# Altium PCB FMCWRadar.PcbDoc (part 5 of 5)
Units mil, origin at the board's own origin, x right, y up, seen from the top; angles counter-clockwise.
Board outline 4763.78 x 3464.57 mil, 6 copper layers (L1, L2(GND), L3, L4, L5(GND), L6), stack 32.112 mil thick; 306 components, 195 nets, 1057 pads, 1126 vias.
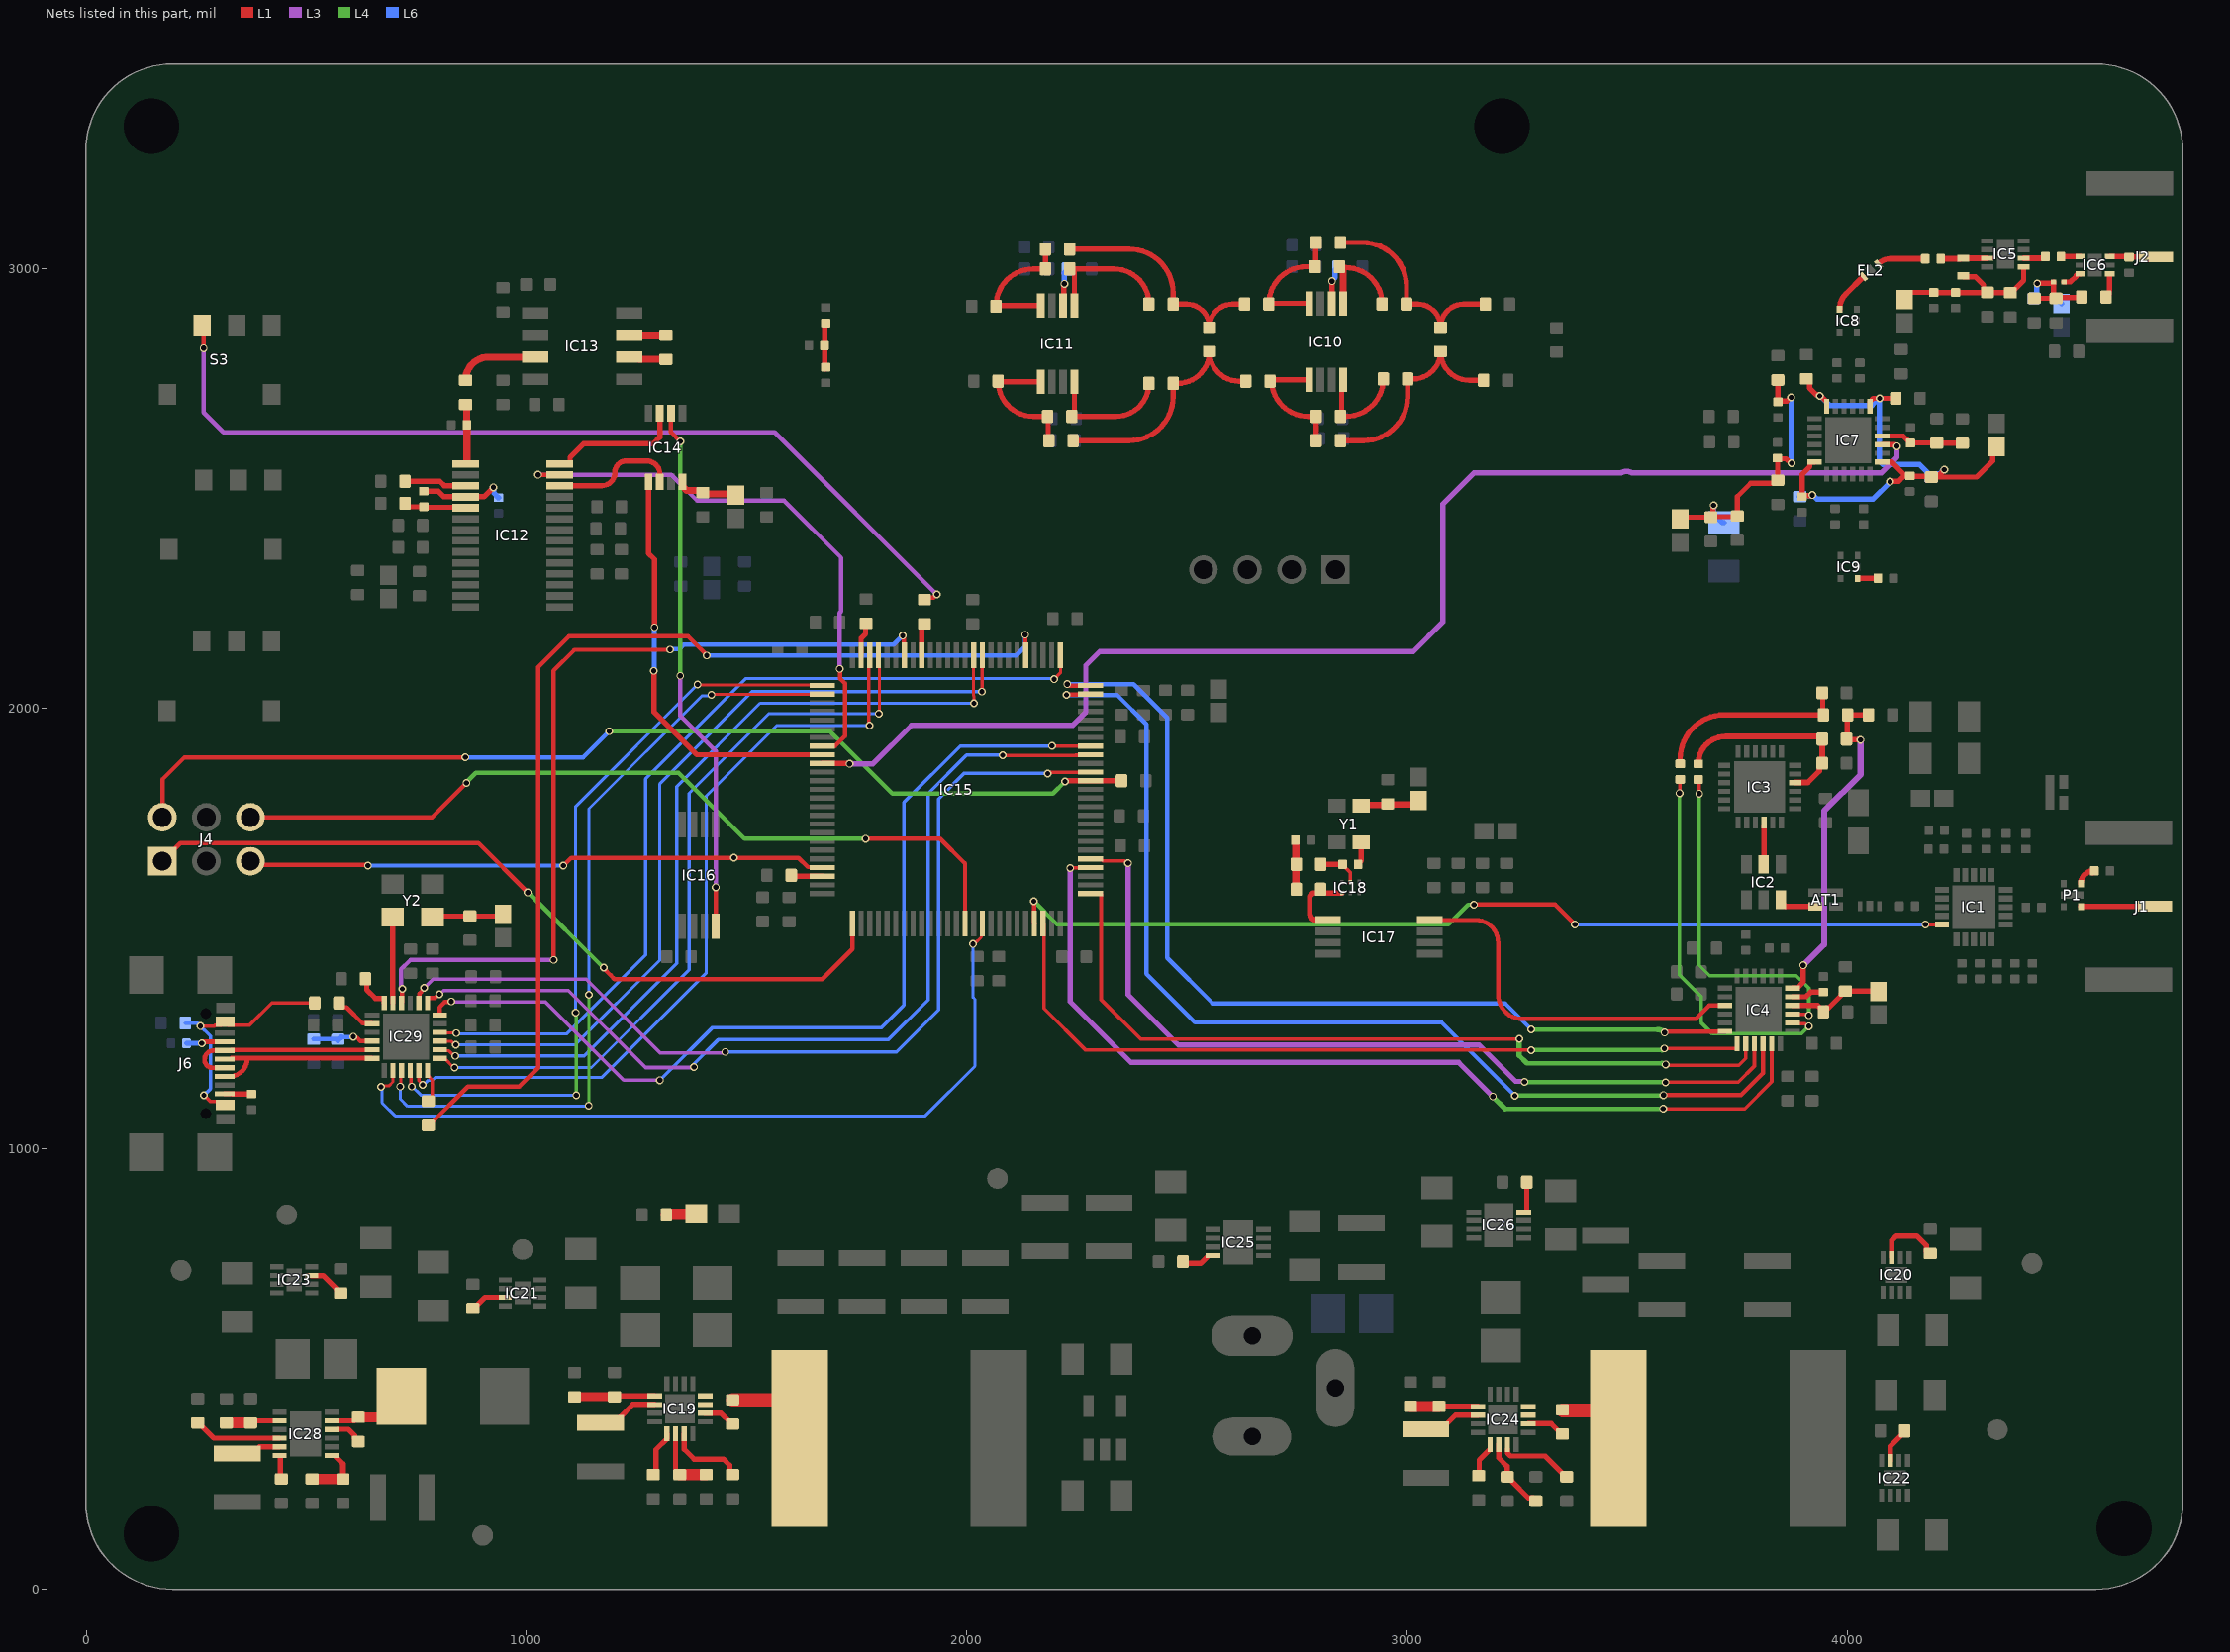
[diagram p8: the nets of this part, all layers, seen from the top]

## Via types
v1: diameter 17.72, hole 11.81, L1 to L6, tented both sides, 692 vias
v2: diameter 15.75, hole 11.81, L1 to L6, tented both sides, 386 vias
v3: diameter 27.56, hole 15.75, L1 to L6, tented both sides, 44 vias
v4: diameter 27.56, hole 11.81, L1 to L6, tented both sides, 3 vias
v5: diameter 23.62, hole 13.78, L1 to L6, tented both sides, 1 vias

## Nets (pads, with @x,y where several pads share a name; then routed paths per layer and width w, separated by ;. In a path a pad name is that pad's centre, name@x,y a point inside that pad or via, vN(x,y) a via of type N, cw(c..) or ccw(c..) an arc to the next point about the centre after c; other vN are vias at no path point) (continued)
NetC14_2: C14.2 C15.2 FB2.1 IC4.22 | length 223.8
  L1 w12: IC4.22@3876.19,1325.37 3933.47,1325.37 C15.2@3946.19,1312.65 ; C15.2@3946.19,1310.69 C15.2@3946.19,1312.65 ; C15.2@3946.19,1311.37 C15.2@3946.19,1312.65 ; FB2.1@4071.19,1357.31 4070.37,1358.13 3994.23,1358.13 3987.23,1351.13 3987.23,1349.17 3957.71,1319.65 3953.19,1319.65 C15.2@3946.19,1312.65
NetC18_2: C18.2 C19.2 IC4.24 R7.1 | length 767.5
  L1 w12: IC4.24@3876.19,1364.74 3886.83,1364.74 3900.61,1378.53 v1(3900.61,1416.8) ; v1(4030.53,1928.61) 4029.49,1929.65 4002.35,1929.65 4000.03,1931.97 4000.03,1984.41 C19.2@4001.31,1985.69 C18.2@4048.63,1985.69
  L3 w14: v1(3900.61,1416.8) 3947.86,1464.04 3947.86,1767.19 4030.53,1849.87 v1(4030.53,1928.61)
NetC19_1: C19.1 R9.2 R10.2 | length 447
  L1 w12: R10.2@3622.95,1878.32 R10.2@3621.04,1874.47 3621.04,1885.69 cw(c3721.04,1885.69) 3721.04,1985.69 C19.1@3946.19,1985.69 ; R9.2@3943.63,2035.69 3944.91,2034.41 C19.1@3944.91,1986.97
NetC20_2: C20.2 IC3.22 R6.2 R7.2 | length 460.6
  L1 w12.69: R6.2@3662.04,1874.19 cw(c3724.33,1874.19) 3724.33,1936.48 3937.84,1936.48 R7.2@3943.63,1930.69 C20.2@3943.63,1875.69 3936.98,1869.03 3936.98,1857.95 3911.1,1832.08 3882.75,1832.08 IC3.22@3882.31,1831.64
NetC29_1: C29.1 C30.2 C37.2 FB3.2 L1.2 R11.1 | length 285.1
  L1 w12: C30.2@4425.04,2931.47 C37.2@4469.33,2931.47 ; v1(4432.04,2965.47) 4466.62,2965.47 4469.33,2968.18 4469.33,2937.18 C37.2@4475.04,2931.47 4476.54,2932.97 4531.98,2932.97 R11.1@4533.48,2934.47
  L6 w12: v1(4432.04,2965.47) 4430.94,2964.38 4430.94,2937.38 C29.1@4425.04,2931.47 4475.66,2931.47 FB3.2@4487.04,2920.09
NetC33_2: C33.2 C34.1 C35.2 C36.2 FB4.2 IC5.1 L2.2 | length 383.3
  L1 w12: FB4.2@4130.76,2929.09 4130.76,2932 4143.62,2944.86 4196.7,2944.86 C35.2@4196.76,2944.8 C36.2@4246.76,2944.8 4310.08,2944.8 C34.1@4312.23,2942.65 ; L2.2@4264.04,2982.71 4266.11,2980.64 4291.26,2980.64 4310.08,2961.82 4310.08,2952.03 C34.1@4313.69,2948.42 ; C34.1@4319.04,2945.03 4319.54,2944.53 4370.54,2944.53 C33.2@4371.04,2944.03 ; C33.2@4373,2944.03 4401.38,2972.41 IC5.1@4401.38,3002.95
NetC38_1: C38.1 FL2.1 | length 108.5
  L1 w12.69: FL2.1@4071.97,3010.66 cw(c4098.08,2984.55) 4098.07,3021.47 C38.1@4177.61,3021.47
NetC38_2: C38.2 IC5.7 L2.1 | length 105.7
  L1 w12.69: C38.2@4213.04,3021.47 4216.54,3021.54 4257.39,3021.54 L2.1@4264.04,3022.47 4270.69,3022.63 IC5.7@4318.7,3022.63
NetC39_1: C39.1 IC5.2 | length 50.9
  L1 w12.69: IC5.2@4401.38,3022.63 4447.11,3022.63 C39.1@4450.61,3026.47
NetC39_2: C39.2 IC6.4 | length 43.8
  L1 w12.69: C39.2@4486.04,3026.47 4486.34,3026.77 IC6.4@4529.76,3026.77
NetC40_2: C40.2 IC6.3 J2.1 | length 101.7
  L1 w6.16: J2.1@4710.51,3019.35 J2.1@4715.08,3023.92
  L1 w12.69: IC6.3@4596.94,3026.52 C40.2@4631.28,3026.52 ; C40.2@4641.03,3025.33 J2.1@4701.92,3025.33
NetC41_1: C41.1 C42.2 C43.2 C44.2 C45.2 C46.2 C47.2 FB5.2 IC7.7 IC7.13 IC7.18 IC7.24 | length 1332.9
  L1 w12: C47.2@3907.76,2748.53 3914.61,2741.67 3914.61,2727.87 3929.8,2712.68 3933.52,2712.68 3936.38,2709.82 v1(3937.92,2709.82) ; v1(3920.95,2484.93) 3919.85,2483.84 3900.5,2483.84 C44.2@3897.76,2481.09 3897.76,2531.72 3915.41,2549.37 3915.41,2560.01 3915.5,2560.1 IC7.24@3926.14,2560.1 ; v1@3941.7,2708.73 3953.7,2696.73 IC7.18@3953.7,2686.09 ; IC7.13@4052.13,2686.09 4052.13,2696.73 4059.87,2704.47 C46.2@4111.04,2704.47 ; IC7.7@4079.68,2560.1 4101.28,2560.1 C45.2@4132.86,2528.52 ; v1(4097.46,2515.22) 4098.56,2516.31 4117.4,2516.31 4120.45,2519.37 4120.45,2519.53 4126.39,2525.47 4126.55,2525.47 4129.61,2528.52 C45.2@4132.86,2528.52 ; C43.2@4191.75,2525.65 4190.32,2527.08 4144.19,2527.08 C45.2@4142.76,2528.52 C45.2@4132.86,2528.52 ; C43.2@4193.72,2525.65 C43.2@4204.21,2525.65 ; v1(4221.04,2542.47) C43.2@4204.21,2525.65 ; FB5.2@4339.32,2594.8 4330.62,2586.1 4330.62,2562.06 4294.21,2525.65 C43.2@4204.21,2525.65
  L6 w12: C42.2@3892.76,2481.21 3895.39,2483.84 3919.85,2483.84 v1(3920.95,2484.93) 3922.5,2484.93 3931.57,2475.85 4059.44,2475.85 4097.46,2513.88 v1(4097.46,2515.22) ; v1(3937.92,2709.82) 3939.47,2709.82 3960.84,2688.45 4056.55,2688.45 4072.29,2704.2 v1(4073.84,2704.2) 4073.84,2561.62 4080.87,2554.59 4164.39,2554.59 C41.1@4184.08,2534.91 ; C41.1@4191.75,2525.65 4198.75,2532.65 4209.66,2532.65 v1@4219.49,2542.47
NetC48_2: C48.2 C49.1 C50.1 C51.2 C52.2 FB6.1 R12.2 R13.2 | length 684.7
  L1 w12: FB6.1@3620.76,2430.32 3625.08,2434.65 C49.1@3690.76,2434.65 3695.94,2439.84 3695.94,2460.38 v1(3697.04,2461.47) ; C49.1@3692.72,2434.65 3694,2435.93 3749.48,2435.93 C50.1@3750.76,2437.21 3750.76,2481.19 3781.21,2511.65 3835.75,2511.65 C51.2@3842.75,2518.65 3842.4,2519 3842.4,2568.4 R12.2@3842.04,2568.76 3843.46,2567.34 3861.75,2567.34 3872.18,2556.9 v1(3873.72,2556.9) ; C52.2@3842.76,2746.09 R13.2@3842.76,2696.52 3844.53,2698.3 3863.24,2698.3 3871.68,2706.73 v1(3873.22,2706.73)
  L6 w12: v1(3697.04,2461.47) 3697.04,2441.68 3716.63,2422.09 C48.2@3720.76,2422.09 ; v1(3873.22,2706.73) 3873.47,2706.48 3873.47,2557.16 v1(3873.72,2556.9)
NetC57_2: C57.2 C58.2 IC7.10 R14.1 | length 189.7
  L1 w12: IC7.10@4079.68,2619.16 4079.78,2619.06 4127.48,2619.06 4139.21,2607.33 4139.21,2606.88 4143.05,2603.04 C57.2@4144.04,2603.04 4144.12,2603.12 4203.96,2603.12 C58.2@4204.04,2603.2 4204.4,2602.84 4261.68,2602.84 R14.1@4262.04,2602.47
NetC60_2: C60.2 IC9.1 | length 48.1
  L1 w12.69: IC9.1@4024.04,2295.5 4070.04,2295.5 C60.2@4070.04,2296.09 cw(c4069.05,2296.09) C60.2@4069.05,2295.1
NetC62_1: C62.1 IC10.5 R15.1 R19.2 | length 289.8
  L1 w12: IC10.5@2778.25,2746.91 2692.58,2746.91 ccw(c2775.97,2746.91) 2775.97,2663.53 C62.1@2794.08,2663.53 R15.1@2794.08,2608.53
NetC62_2: C62.2 IC10.8 R18.1 | length 234.3
  L1 w12: IC10.8@2856.64,2748.53 ccw(c2856.64,2746.91) IC10.8@2855.02,2746.91 2852.16,2744.06 2852.16,2666.5 C62.2@2849.2,2663.53 2861.64,2663.53 ccw(c2861.64,2748.53) R18.1@2946.64,2748.53
NetC63_1: C63.1 C64.2 IC11.5 R16.1 | length 311.7
  L1 w12: IC11.5@2168.25,2741.91 2073.25,2741.91 cw(c2073.25,2743.53) C64.2@2071.64,2743.53 ccw(c2151.64,2743.53) 2151.64,2663.53 C63.1@2184.08,2663.53 2185.36,2662.25 2185.36,2609.81 R16.1@2186.64,2608.53
NetC63_2: C63.2 IC11.8 R20.1 | length 298.5
  L1 w12: IC11.8@2245.02,2741.91 2245.02,2669.36 C63.2@2239.2,2663.53 2245.02,2663.53 2339.08,2663.53 ccw(c2339.08,2738.53) R20.1@2414.08,2738.53
NetC65_1: C65.1 R15.2 R17.1 R18.2 | length 495.4
  L1 w12: R15.2@2849.2,2608.53 2901.76,2608.53 ccw(c2901.76,2708.53) 3001.76,2708.53 R18.2@3001.76,2748.53 3014.2,2748.53 ccw(c3014.2,2810.97) C65.1@3076.64,2810.97 ccw(c3142.13,2810.97) 3142.13,2745.47 R17.1@3174.48,2745.47
NetC65_2: C65.2 R22.1 R23.2 R26.2 | length 486.2
  L1 w12: R26.2@2849.2,3058.53 2899.2,3058.53 cw(c2899.2,2958.53) 2999.2,2958.53 R23.2@2999.2,2918.53 3024.2,2918.53 cw(c3024.2,2866.09) C65.2@3076.64,2866.09 cw(c3129.02,2866.09) 3129.02,2918.47 R22.1@3178.48,2918.47
NetC66_1: C66.1 R16.2 R19.1 R20.2 | length 559.2
  L1 w12: R16.2@2241.76,2608.53 2369.2,2608.53 ccw(c2369.2,2708.53) 2469.2,2708.53 R20.2@2469.2,2738.53 2479.2,2738.53 ccw(c2479.2,2810.97) C66.1@2551.64,2810.97 ccw(c2619.08,2810.97) 2619.08,2743.53 R19.1@2634.08,2743.53
NetC66_2: C66.2 R24.1 R25.2 R27.2 | length 539.3
  L1 w12: R27.2@2234.2,3043.53 2369.2,3043.53 cw(c2369.2,2943.53) 2469.2,2943.53 R25.2@2469.2,2918.53 2499.2,2918.53 cw(c2499.2,2866.09) C66.2@2551.64,2866.09 cw(c2604.08,2866.09) 2604.08,2918.53 R24.1@2631.52,2918.53
NetC67_2: C67.2 C71.1 IC11.4 R27.1 | length 308.5
  L1 w12: IC11.4@2168.25,2915.14 2068.25,2915.14 ccw(c2068.25,2913.53) C67.2@2066.64,2913.53 cw(c2151.64,2913.53) 2151.64,2998.53 C71.1@2179.08,2998.53 R27.1@2179.08,3043.53
NetC68_2: C68.2 IC10.2 | length 89.5
  L1 w12: IC10.2@2829.43,2920.14 2829.74,2920.45 2829.74,2970.17 v1(2830.04,2970.47)
  L6 w12: v1(2830.04,2970.47) 2830.04,2972.02 2837.08,2979.06 2837.08,2996.53 C68.2@2844.08,3003.53
NetC69_2: C69.2 IC11.2 | length 86.9
  L1 w12: IC11.2@2219.43,2915.14 2220.94,2916.65 2220.94,2963.38 v1(2222.04,2964.47)
  L6 w12: v1(2222.04,2964.47) 2222.08,2989.57 C69.2@2229.08,2998.53
NetC70_1: C70.1 IC10.4 R24.2 R26.1 | length 302
  L1 w12: IC10.4@2778.25,2920.14 2688.25,2920.14 ccw(c2688.25,2918.53) R24.2@2686.64,2918.53 cw(c2771.64,2918.53) 2771.64,3003.53 C70.1@2791.52,3003.53 2792.8,3004.81 2792.8,3057.25 R26.1@2794.08,3058.53
NetC70_2: C70.2 IC10.1 R23.1 | length 229.7
  L1 w12: C70.2@2846.64,3001.57 2861.04,3001.57 cw(c2861.04,2918.53) R23.1@2944.08,2918.53
  L1 w16: C70.2@2846.64,3001.57 2855.02,2993.18 IC10.1@2855.02,2920.14
NetC71_2: C71.2 IC11.1 R25.1 | length 315.1
  L1 w12: IC11.1@2245.02,2915.14 2245.02,2987.7 ccw(c2234.2,2987.7) C71.2@2234.2,2998.53 2334.08,2998.53 cw(c2334.08,2918.53) R25.1@2414.08,2918.53
NetC88_1: C88.1 IC12.1 R30.2 | length 136.5
  L1 w16: IC12.1@861.76,2556.13 864.19,2556.13 864.75,2556.69 C88.1@864.75,2644.47 ; R30.2@861.76,2690.53 864.18,2688.1 C88.1@864.18,2646.03
NetC89_2: C89.2 FB7.1 IC14.8 | length 140.1
  L1 w16: IC14.8@1354.14,2515.33 1354.14,2505.49 1363.98,2495.65 1395.75,2495.65 C89.2@1400.75,2490.65 1403.73,2487.68 1472.78,2487.68 FB7.1@1475.76,2484.7
NetC93_2: C93.2 IC12.3 | length 141.6
  L1 w12: C93.2@724.31,2516.09 803.42,2516.09 813.38,2506.13 IC12.3@861.76,2506.13
NetC94_2: C94.2 IC12.5 R33.1 | length 142
  L1 w12: C94.2@724.31,2466.09 724.31,2465.37 731.31,2458.37 R33.1@766.76,2458.37 767.88,2457.25 860.63,2457.25 IC12.5@861.76,2456.13
NetC118_2: C118.2 IC15.73 | length 71.1
  L1 w12: C118.2@1601.76,1621.09 1603.51,1619.33 1672.01,1619.33 IC15.73@1672.11,1619.24
NetC121_1: C121.1 IC15.49 | length 77.6
  L1 w12: IC15.49@1760.22,2120.73 1760.31,2120.83 1760.31,2159.38 1770.49,2169.56 1770.49,2192.26 C121.1@1771.75,2193.53
NetC122_2: C122.2 R38.2 R39.1 | length 111
  L1 w16: C122.2@2746.76,1701.09 2747.98,1699.87 2747.98,1646.09 2747.98,1592.31 R39.1@2749.2,1591.09
NetC123_2: C123.2 FB12.2 Y1.4 | length 138.3
  L1 w15: Y1.4@2896.76,1778.76 2899.14,1781.15 2956.33,1781.15 C123.2@2958.56,1783.37 ; C123.2@2956.76,1783.53 2958.49,1781.8 3017.46,1781.8 FB12.2@3026.76,1791.09
NetC124_1: C124.1 Y1.3 | length 53
  L1 w12.69: C124.1@2889.47,1646.09 2889.47,1647.07 2896.76,1654.36 Y1.3@2896.76,1696.09
NetC124_2: C124.2 IC18.2 R38.1 | length 98.4
  L1 w8: C124.2@2854.04,1646.09 2854.04,1645.1 2871.76,1627.39 IC18.2@2871.76,1604.71
  L1 w12.69: R38.1@2804.31,1646.09 C124.2@2854.04,1646.09
NetC128_1: C128.1 IC19.10 | length 72.7
  L1 w12: IC19.10@1405.85,399.39 1441.53,399.39 1466.33,374.59 C128.1@1468.29,374.59
NetC128_2: C128.2 IC19.11 IC19.12 L3.1 | length 211.1
  L1 w30: C128.2@1468.29,429.71 1571.56,429.71 1620.53,380.73 L3.1@1620.53,342.15
NetC133_1: C133.1 IC20.7 | length 150.8
  L1 w12: IC20.7@4101.63,752.78 4101.72,752.87 4101.72,791.46 4112.26,801.99 4158.52,801.99 4180.08,780.43 4180.08,766.75 C133.1@4184.86,761.96
NetC135_1: C135.1 IC21.7 | length 84.2
  L1 w12: C135.1@878.29,637.15 880.25,637.15 905.96,662.86 IC21.7@951.79,662.86
NetC139_1: C139.1 IC19.5 | length 105.3
  L1 w12: C139.1@1288.29,259.71 1294.31,265.73 1294.31,316.59 1319.24,341.51 IC19.5@1319.24,352.15
NetC140_2: C140.2 IC19.2 | length 91.8
  L1 w12: C140.2@1211.91,389.97 1212.37,389.97 1241.48,419.08 IC19.2@1291.68,419.08
NetC141_1: C141.1 IC22.7 | length 80.9
  L1 w12: IC22.7@4098.45,291.52 4098.45,324.48 4130.93,356.96 C141.1@4130.93,358.92
NetC143_1: C143.1 IC23.7 | length 84
  L1 w12: IC23.7@512.03,712.15 512.13,712.06 538.39,712.06 569.33,681.11 569.33,679.15 576.33,672.15 C143.1@578.29,672.15
NetC148_1: C148.1 IC24.10 | length 87
  L1 w12: IC24.10@3275.85,375.22 3328.14,375.22 3351.33,352.03 C148.1@3353.29,352.03
NetC148_2: C148.2 IC24.11 IC24.12 L4.1 | length 161.9
  L1 w31.5: C148.2@3354.79,405.65 3433.81,405.65 3480.53,358.92 L4.1@3480.53,342.15
NetC151_1: C151.1 IC24.5 | length 81.6
  L1 w12: C151.1@3163.29,257.15 3164.39,258.25 3164.39,292.5 3189.24,317.34 IC24.5@3189.24,327.98
NetC152_2: C152.2 IC24.2 | length 132
  L1 w12: C152.2@3043.29,362.15 3078.29,362.15 3111.05,394.91 IC24.2@3161.68,394.91
NetC158_2: C158.2 IC25.4 | length 77.9
  L1 w12: C158.2@2491.16,743.57 2495.1,739.63 2531.71,739.63 2549.42,757.35 IC25.4@2560.06,757.35
NetC166_2: C166.2 IC26.4 | length 74.6
  L1 w12: IC26.4@3265.93,856.34 3272.41,856.34 3272.5,856.43 C166.2@3272.5,924.41
NetC167_1: C167.1 IC28.10 | length 63.3
  L1 w12: IC28.10@570.93,362.28 571.21,362.56 595.54,362.56 609.33,348.77 609.33,341.59 616.33,334.59 C167.1@618.29,334.59
NetC167_2: C167.2 IC28.11 L5.1 | length 181.8
  L1 w12: IC28.11@557.35,381.68 608.3,381.68 616.33,389.71 C167.2@618.29,389.71 ; L5.1@668.72,389.71 L5.1@716.16,437.15
  L1 w23: C167.2@618.29,389.71 L5.1@668.72,389.71
NetC168_1: C168.1 IC28.4 | length 200.4
  L1 w12: C168.1@253.29,377.15 255.25,377.15 290.09,342.31 IC28.4@439.24,342.31
NetC169_2: C169.2 IC28.5 | length 102.4
  L1 w12: C169.2@343.29,307.15 378.29,307.15 393.76,322.62 IC28.5@439.24,322.62
NetC172_1: C172.1 C173.2 IC29.4 | length 140.4
  L1 w10: v1(607.04,1254.47) 608.51,1253 614.5,1253 622.59,1244.91 649.07,1244.91 IC29.4@649.51,1244.47
  L6 w10: C173.2@516.76,1248.65 C172.1@571.75,1248.65 ; C172.1@579.17,1253.51 v1@606.08,1253.51
  L6 w12.69: C172.1@571.75,1246.1 C172.1@579.17,1253.51 ; v1@606.08,1253.51 v1(607.04,1254.47)
NetC180_1: C180.1 J6.A4 J6.B4 R57.2 | length 554
  L1 w8: v1(259.47,1278.53) 291.14,1278.53 292.98,1280.36 306.66,1280.36 314.47,1288.17 322.15,1280.49 370.95,1280.49 421.55,1331.09 R57.2@519.2,1331.09 ; v1(267.47,1121.53) 267.93,1121.53 282.45,1107.01 306.66,1107.01 J6.B4@314.47,1099.2
  L6 w8: C180.1@225.03,1285.53 252.47,1285.53 v1(259.47,1278.53) 282.22,1255.78 282.22,1136.27 v1(267.47,1121.53)
NetC181_2: C181.2 FB13.2 Y2.4 | length 162.7
  L1 w12: Y2.4@786.76,1526.28 789.12,1528.65 C181.2@871.75,1528.65 942.7,1528.65 FB13.2@946.76,1532.7
NetFL2_3: FL2.3 IC8.1 | length 93.4
  L1 w12.69: IC8.1@3983.27,2907.07 cw(c4032.2,2907.07) 3997.6,2941.67 FL2.3@4036.49,2980.57
NetIC1_5: IC1.5 IC15.97 | length 2173.8
  L1 w10: v1(2152.58,1562.47) 2153.25,1561.8 2153.25,1512.11 IC15.97@2153.92,1511.44 ; v1(3152.58,1554.59) 3336.63,1554.59 v1(3381.83,1509.39) ; v1(4178.09,1509.39) IC1.5@4215.49,1509.39
  L4 w10: v1(2152.58,1562.47) 2205.51,1509.54 3094.38,1509.54 3139.14,1554.3 3152.29,1554.3 v1(3152.58,1554.59)
  L6 w10: v1(3381.83,1509.39) v1(4178.09,1509.39)
NetIC2_2: IC2.2 IC3.16 | length 86.8
  L1 w12.69: IC2.2@3811.46,1646.82 IC3.16@3811.46,1733.65
NetIC4_9: IC4.9 IC17.8 | length 861.9
  L1 w10: IC17.8@3052.42,1519.47 3156.2,1519.47 cw(c3156.2,1467.98) 3207.7,1467.98 3207.7,1349.87 ccw(c3262.82,1349.87) 3262.82,1294.75 3656.52,1294.75 3687.14,1325.37 IC4.9@3722.65,1325.37
NetIC4_12: IC4.12 IC15.25 | length 2196.6
  L1 w10: v1(2228.72,2055.44) 2230.81,2055.44 2233.94,2052.31 IC15.25@2281.4,2052.31 ; v1(3585.59,1263.9) 3587.67,1263.9 3590.1,1266.32 IC4.12@3722.65,1266.32
  L4 w10: v1@3283.12,1270.51 3570.01,1270.51 ; v1@3584.11,1265.37 v1(3585.59,1263.9)
  L4 w12: 3570.01,1270.51 cw(c3570.01,1248.85) 3585.32,1264.16 v1(3585.59,1263.9)
  L6 w10: v1(2228.72,2055.44) 2307.78,2055.44 2307.82,2055.4 2379.08,2055.4 2455.73,1978.75 2455.73,1433.27 2558.45,1330.55 3223.08,1330.55 v1(3282.5,1271.13)
NetIC4_13: IC4.13 IC15.98 | length 1818.7
  L1 w8: IC15.98@2173.61,1511.44 2175.51,1509.54 2175.51,1482.1 2175.89,1481.72 2175.89,1318.68 2270.69,1223.88 v1(3282.5,1223.88) ; v1(3585.13,1227.85) 3748.3,1227.85 3750.21,1229.76 IC4.13@3750.21,1238.76
  L4 w10: v1(3282.5,1223.88) v1@3579.61,1223.88
  L4 w12: v1@3579.61,1223.88 3583.58,1227.85 v1(3585.13,1227.85)
NetIC4_14: IC4.14 IC15.1 | length 1852.1
  L1 w8: IC15.1@2281.4,1579.87 2303.75,1579.87 2305.66,1577.96 2305.66,1338.52 2394.62,1249.56 v1(3255.69,1249.56) ; v1(3587.98,1191.55) 3589.63,1189.89 3754.42,1189.89 3769.89,1205.37 IC4.14@3769.89,1238.76
  L4 w10: 3272.57,1194.44 v1@3580.19,1194.44
  L4 w12: v1@3254.99,1248.86 3254.99,1212.03 3272.57,1194.44 ; v1@3580.19,1194.44 3581.99,1192.64 3586.88,1192.64 v1(3587.98,1191.55)
NetIC4_15: IC4.15 IC15.5 | length 1958.4
  L1 w8: IC15.5@2281.4,1658.61 2304.53,1658.61 2309.44,1653.7 2359.02,1653.7 2364.05,1648.67 v1(2366.68,1648.67) ; v1(3587.84,1150.94) 3587.95,1151.05 3752.98,1151.05 3789.58,1187.65 IC4.15@3789.58,1238.76
  L3 w12: v1(2366.68,1648.67) 2366.68,1350.3 2481.29,1235.69 3164.39,1235.69 3247.21,1152.88 3266.3,1152.88 v1(3267.4,1151.78)
  L4 w10: v1@3268.24,1150.94 v1(3587.84,1150.94)
NetIC4_16: IC4.16 IC15.24 | length 2435.1
  L1 w10: v1(2226.9,2030.9) 2227.77,2031.76 2280.54,2031.76 IC15.24@2281.4,2032.62 ; v1(3583.17,1121.85) 3759.21,1121.85 3809.26,1171.9 IC4.16@3809.26,1238.76
  L4 w10: v1@3246.16,1121.09 v1@3582.41,1121.09
  L4 w12: v1(3245.4,1120.33) v1@3246.16,1121.09 ; v1@3582.41,1121.09 v1(3583.17,1121.85)
  L6 w10: v1(2226.9,2030.9) 2341.63,2030.9 2408.49,1964.04 2408.49,1397.11 2518.72,1286.87 3078.86,1286.87 v1(3245.4,1120.33)
NetIC4_17: IC4.17 IC15.4 | length 2156.3
  L1 w8: v1(2235.26,1637.27) 2236.09,1638.1 2280.57,1638.1 IC15.4@2281.4,1638.92 ; v1(3582.37,1090.93) 3767.66,1090.93 3828.95,1152.22 IC4.17@3828.95,1238.76
  L3 w12: v1(2235.26,1637.27) 2235.26,1334.12 2373.05,1196.32 3117.7,1196.32 v1(3195.33,1118.69)
  L4 w10: 3223.09,1090.93 v1(3582.37,1090.93)
  L4 w12: v1(3195.33,1118.69) 3223.09,1090.93
NetIC4_20: IC4.20 R10.1 | length 876.1
  L1 w8: v1(3619.53,1807.58) 3620.29,1808.33 3620.29,1838.29 R10.1@3621.04,1839.04 ; IC4.20@3876.19,1286 3878.1,1284.1 3904.68,1284.1 3910.64,1278.13 v1(3913.27,1278.13)
  L4 w8: v1(3619.53,1807.58) 3619.53,1394.73 3668.33,1345.93 3668.33,1286.87 3694.18,1261.02 3896.16,1261.02 v1(3913.27,1278.13)
NetIC4_21: IC4.21 R6.1 | length 795.4
  L1 w8: v1(3664.39,1806.56) R6.1@3664.39,1841.99 ; IC4.21@3876.19,1305.69 3908.09,1305.69 3910.65,1303.14 v1(3913.28,1303.14)
  L4 w8: v1(3664.39,1806.56) 3664.39,1416.8 3688.01,1393.17 3884.87,1393.17 3913.28,1364.76 v1(3913.28,1303.14)
NetIC4_23: IC4.23 R8.1 | length 74.4
  L1 w12: IC4.23@3876.19,1345.06 3876.29,1345.15 3906.83,1345.15 3917.37,1355.69 R8.1@3946.19,1355.69
NetIC6_1: IC6.1 R11.2 | length 56.1
  L1 w12: R11.2@4588.6,2934.47 4595.6,2941.47 4595.6,2949.68 4596.38,2950.46 IC6.1@4596.38,2987.31
NetIC6_6: IC6.6 L1.1 | length 45.6
  L1 w12: L1.1@4492.66,2968.47 4507.23,2968.47 4521.19,2982.44 4521.19,2983.57 4525.02,2987.4 IC6.6@4529.76,2987.4
NetIC7_9: IC7.9 IC15.60 | length 3011
  L1 w12: IC15.60@1672.11,1875.14 1672.2,1875.05 1733.61,1875.05 v1(1734.2,1874.46) ; IC7.9@4079.68,2599.47 4079.78,2599.38 4108.3,2599.38 4112,2595.67 v1(4113.55,2595.67)
  L3 w12: v1(1734.2,1874.46) 1787.41,1874.46 1874.52,1961.57 2240.66,1961.57 2270.69,1991.6 2270.69,2097.9 2302.19,2129.39 3014.79,2129.39 3081.72,2196.32 3081.72,2464.04 3152.58,2534.91 3483.13,2534.91 ccw(c3483.13,2546.91) 3488.78,2536.32 cw(c3499.08,2517.17) 3509.37,2536.33 ccw(c3515.03,2546.91) 3515.03,2534.91 4077.78,2534.91 4113.55,2570.68 v1(4113.55,2595.67)
NetIC12_4: IC12.4 R33.2 R34.2 | length 201.5
  L1 w12: R33.2@766.76,2493.8 799.57,2493.8 812.29,2481.09 861.76,2481.09 903.65,2481.09 v1(925.04,2502.47)
  L6 w12: v1(925.04,2502.47) 926.13,2501.38 926.13,2489.43 931.93,2483.63 931.93,2482.65 935.77,2478.8 R34.2@936.76,2478.8
NetIC12_26: IC12.26 IC14.6 | length 294.1
  L1 w12: IC12.26@1075.3,2506.13 1170.69,2506.13 ccw(c1170.69,2536.47) 1201.04,2536.47 cw(c1227.04,2536.47) 1227.04,2562.47 1273.04,2562.47 cw(c1273.04,2532.55) 1302.96,2532.55 IC14.6@1302.96,2515.33
NetIC12_27: IC12.27 IC15.58 | length 1265
  L1 w10: v1(1026.6,2530.97) 1026.67,2530.9 1075.49,2530.9 IC12.27@1075.56,2530.83 ; IC15.58@1695.14,1914.61 1700.89,1914.61 1723.45,1937.16 1723.45,2057.17 1712.73,2067.88 1712.73,2088.93 v1(1711.64,2090.02)
  L3 w10: v1(1026.6,2530.97) 1329.01,2530.97 1388.06,2471.91 1585.65,2471.91 1715.26,2342.3 1715.26,2220.52 1711.64,2216.9 v1(1711.64,2090.02)
NetIC12_28: IC12.28 IC14.3 | length 314.1
  L1 w12: IC12.28@1075.3,2556.13 1096.77,2556.13 1099.34,2558.69 1099.34,2570.73 1130.08,2601.47 1288.04,2601.47 1302.96,2616.39 IC14.3@1302.96,2670.84
NetIC13_2: IC13.2 R32.1 | length 85.3
  L1 w16: IC13.2@1233.53,2798.09 1250.75,2798.09 1255.75,2793.09 R32.1@1316.76,2793.09
NetIC13_3: IC13.3 R32.2 | length 83.3
  L1 w16: IC13.3@1233.53,2848.09 1233.59,2848.15 R32.2@1316.76,2848.21 R32.2@1316.76,2848.21
NetIC13_7: IC13.7 R30.1 | length 197.2
  L1 w16: R30.1@868.72,2750.65 863.72,2745.65 R30.1@861.76,2745.65 cw(c914.2,2745.65) 914.2,2798.09 IC13.7@1019.98,2798.09
NetIC14_2: IC14.2 IC16.8 | length 1209.9
  L1 w10: IC14.2@1328.55,2670.84 1328.55,2627.85 v1(1349.67,2606.73) ; IC16.8@1430.14,1505.42 v1(1430.14,1593.96)
  L3 w10: v1@1349.43,2076.49 1349.43,1983.72 1430.14,1903.02 v1(1430.14,1593.96)
  L4 w10: v1(1349.43,2074.28) 1349.55,2074.4 1349.55,2606.61 v1(1349.67,2606.73)
NetIC14_5: IC14.5 IC15.59 | length 952.1
  L1 w12: IC14.5@1277.37,2515.33 1277.37,2352.57 1290.98,2338.96 v1(1290.98,2184.5) ; v1(1289.52,2085.64) 1289.52,1992.45 1387.15,1894.83 IC15.59@1672.11,1894.83
  L6 w12: v1(1289.52,2085.64) 1290.25,2086.37 1290.25,2183.77 v1(1290.98,2184.5)
NetIC17_1: IC17.1 IC18.4 R39.2 | length 146.4
  L1 w12.69: IC17.1@2794.7,1519.68 cw(c2794.7,1534.85) 2779.53,1534.85 2779.53,1573.37 2786.96,1580.81 2797.66,1580.81 2804.31,1587.46 R39.2@2804.31,1589.42 ; R39.2@2804.31,1590.09 2813.31,1581.09 IC18.4@2852.07,1581.09
NetIC19_1: IC19.1 R43.1 R45.2 | length 183.3
  L1 w12: R45.2@1199.83,436.48 1202.02,438.67 1291.58,438.67 IC19.1@1291.68,438.76
  L1 w20: R43.1@1109.27,436.48 R45.2@1199.83,436.48
NetIC19_6: IC19.6 R42.1 R44.2 | length 157.5
  L1 w12: IC19.6@1338.92,352.15 1338.92,267.12 1346.33,259.71 R44.2@1348.29,259.71
  L1 w25: R44.2@1348.29,259.71 R42.1@1408.29,259.71
NetIC19_7: IC19.7 R46.2 | length 177.1
  L1 w12: IC19.7@1358.61,352.15 1358.61,317.07 1380.93,294.75 1447.86,294.75 1461.84,280.77 1461.84,266.16 R46.2@1468.29,259.71
NetIC24_1: IC24.1 R48.1 R50.2 | length 153.4
  L1 w12: R50.2@3073.29,414.59 IC24.1@3161.68,414.59
  L1 w25: R48.1@3008.29,414.59 R50.2@3073.29,414.59
NetIC24_6: IC24.6 R47.1 R49.2 | length 170.3
  L1 w12: IC24.6@3208.92,327.98 3209.01,327.88 3209.01,297.37 3227.71,278.68 3227.71,255.29 R49.2@3228.29,254.71 3230.25,254.71 3237.25,247.71 3237.25,245.75 3276.41,206.59 3286.29,206.59 R47.1@3293.29,199.59
NetIC24_7: IC24.7 R51.2 | length 165.5
  L1 w12: IC24.7@3228.61,317.24 3228.61,308.77 3235.64,301.74 3314.29,301.74 3361.33,254.71 R51.2@3363.29,254.71
NetIC28_2: IC28.2 R52.1 R54.2 | length 122.9
  L1 w12: R52.1@373.29,377.15 377.72,381.58 439.14,381.58 IC28.2@439.24,381.68
  L1 w25: R54.2@318.29,377.03 R54.2@318.29,377.03 373.23,377.09 R52.1@373.29,377.15
NetIC28_6: IC28.6 R55.2 | length 56
  L1 w12: IC28.6@439.24,302.94 441.17,302.94 441.26,302.84 441.26,251.74 R55.2@443.29,249.71
NetIC28_7: IC28.7 R53.1 R56.2 | length 131.5
  L1 w12: 554.73,249.71 556.04,251.02
  L1 w12.8: IC28.7@566.7,302.45 566.7,300.48 583.29,283.89 R53.1@583.29,249.71
  L1 w23: R56.2@513.29,249.71 554.73,249.71 R53.1@583.29,249.71
NetIC29_2: IC29.2 R57.1 | length 95.9
  L1 w10: R57.1@574.31,1331.09 574.31,1329.13 582.31,1321.13 591.63,1321.13 628,1284.75 648.61,1284.75 IC29.2@649.51,1283.84
NetIC29_12: IC29.12 R58.2 | length 81.1
  L1 w8: IC29.12@775.5,1177.54 775.5,1166.72 786.28,1155.94 786.28,1111.71 782.6,1108.03 R58.2@777.04,1108.03
NetIC29_23: IC29.23 Y2.3 | length 195.4
  L1 w12: Y2.3@696.2,1526.28 696.2,1348.84 696.76,1348.29 IC29.23@696.76,1331.09
NetIC29_24: IC29.24 R59.2 | length 84.4
  L1 w12: R59.2@634.31,1386.09 637.09,1383.31 637.09,1361.35 656.95,1341.49 676.98,1341.49 677.07,1341.39 IC29.24@677.07,1331.09
NetJ1_1: J1.1 P1.1 | length 136.7
  L1 w12.69: P1.1@4531.53,1550.66 4662.85,1550.66 J1.1@4666.64,1546.87
NetJ6_A5: J6.A5 R60.2 | length 88
  L1 w12: v1(262.47,1239.53) 264.01,1239.53 267.39,1242.9 J6.A5@314.47,1242.9
  L6 w12: R60.2@227.9,1239.53 v1(262.47,1239.53)
NetJ6_B5: J6.B5 R61.2 | length 61.2
  L1 w12: J6.B5@314.47,1124.79 331.01,1124.79 331.55,1124.24 R61.2@375.47,1124.24
NetLED1_2: LED1.2 R37.1 | length 72.9
  L1 w12: R37.1@1317.94,845.93 R37.1@1317.94,849.87
  L1 w25: R37.1@1317.94,849.87 1317.94,850.51 1318.44,851.01 1384.43,851.01 LED1.2@1385.57,852.15
NetP1_2: P1.2 R4.2 | length 52.8
  L1 w12.69: P1.2@4531.38,1602.15 cw(c4560.32,1602.15) 4560.32,1631.09 R4.2@4561.76,1631.09 4561.76,1630.1 R4.2@4558.26,1626.61
NetR28_2: R28.2 R29.2 R31.2 | length 106.6
  L1 w12: R31.2@1677.96,2770.91 1677.96,2824.47 R28.2@1677.96,2877.47
RF_OUT_TO_AT: AT1.1 IC2.6 | length 87
  L1 w12.69: IC2.6@3849.71,1565.38 ccw(c3864.75,1565.38) 3864.75,1550.34 AT1.1@3928.13,1550.34
SWD_CLK: IC15.76 J4.1 | length 1799.8
  L1 w10: J4.1@173.05,1653.02 214.03,1694 891.13,1694 v1(1002.98,1582.15) ; v1(1175.98,1411.42) 1175.98,1409.33 1191.6,1393.71 1191.6,1393.53 1199.83,1385.3 1672.27,1385.3 1740.53,1453.57 IC15.76@1740.53,1511.44
  L4 w10: v1(1002.98,1582.15) 1004.11,1582.15 1174.84,1411.42 v1(1175.98,1411.42)
SWD_DIO: IC15.72 J4.5 | length 1319.7
  L1 w10: J4.5@373.05,1653.02 381.34,1644.73 638.53,1644.73 v1(640.01,1643.26) ; v1(1083.89,1643.03) 1101.75,1660.89 v1(1471.48,1660.89) 1618.39,1660.89 1639.45,1639.83 1671.2,1639.83 IC15.72@1672.11,1638.92
  L6 w10: v1(640.01,1643.26) 640.12,1643.14 1083.78,1643.14 v1(1083.89,1643.03)
SWD_NRST: C120.2 IC15.14 J4.2 | length 2380.4
  L1 w10: J4.2@173.05,1753.02 173.05,1838.84 223.45,1889.24 v1(861.24,1889.24)
  L1 w12: v1(2223.45,1834.12) 2224.99,1834.12 2226.65,1835.77 IC15.14@2281.4,1835.77 ; IC15.14@2281.56,1835.93 C120.2@2351.6,1835.93
  L1 w15: C120.2@2351.6,1835.93 C120.2@2351.76,1836.09
  L4 w10: v1(1188.01,1948.29) 1689.71,1948.29 1831.27,1806.74 2196.06,1806.74 v1(2223.45,1834.12)
  L6 w10: v1(861.24,1889.24) 1128.96,1889.24 v1(1188.01,1948.29)
SWD_SWO: IC15.89 J4.6 | length 1887.7
  L1 w10: J4.6@373.05,1753.02 785.63,1753.02 v1(863.73,1831.12) ; v1(1770.69,1704.2) 1939.98,1704.2 1996.44,1647.74 IC15.89@1996.44,1511.44
  L4 w10: v1(863.73,1831.12) 863.73,1832.67 884.87,1853.8 1345.5,1853.8 1495.1,1704.2 v1(1770.69,1704.2)
TX/STDBY: R41.2 S3.C1 | length 2069
  L1 w10: S3.C1@263.88,2870.89 266.75,2868.02 v1(266.75,2818.37) ; R41.2@1904.05,2247.37 1909.05,2252.37 1925.16,2252.37 v1(1932.11,2259.32)
  L3 w10: v1(266.75,2818.37) 266.75,2672.7 311.98,2627.48 1563.95,2627.48 v1(1932.11,2259.32)
TX/STDBY-MCU: IC15.42 R41.1 | length 74
  L1 w12: IC15.42@1898.01,2120.73 1898.01,2186.21 R41.1@1904.05,2192.25
ULPI-D0: IC15.26 IC29.16 | length 2026.9
  L1 w7: IC29.16@803.05,1264.16 803.85,1263.36 840.13,1263.36 v1(840.92,1262.57) ; v1(2199.07,2066.57) 2213.2,2080.7 2213.2,2120.51 IC15.26@2212.98,2120.73
  L6 w7: v1(840.92,1262.57) 842.19,1261.31 1092.13,1261.31 1270.69,1439.86 1270.69,1840.13 1499.04,2068.47 2197.17,2068.47 v1(2199.07,2066.57)
ULPI-D1: IC15.35 IC29.15 | length 1884.6
  L1 w7: IC29.15@803.05,1244.47 829.29,1244.47 837.34,1236.43 v1(839.66,1236.43) ; v1(2034.56,2038.25) 2035.18,2038.87 2035.18,2120.11 IC15.35@2035.81,2120.73
  L6 w7: v1(839.66,1236.43) 1110.99,1236.43 1303.06,1428.5 1303.06,1828.96 1512.35,2038.25 v1(2034.56,2038.25)
ULPI-D2: IC15.36 IC29.14 | length 1896.1
  L1 w7: IC29.14@803.05,1224.79 805.46,1222.38 824.03,1222.38 835.63,1210.79 v1(838.53,1210.79) ; IC15.36@2016.13,2120.73 2015.31,2119.92 2015.31,2030.27 2016.54,2029.04 v1(2016.54,2011.94)
  L6 w7: v1(838.53,1210.79) 1131.35,1210.79 1341.56,1420.99 1341.56,1822.8 1530.71,2011.94 v1(2016.54,2011.94)
ULPI-D3: IC15.47 IC29.13 | length 1696.8
  L1 w7: IC29.13@813.99,1204.99 834.59,1184.39 v1(836.77,1184.39) ; IC15.47@1799.59,2120.73 1801.81,2118.51 1801.81,1989.57 v1(1800.46,1988.22)
  L6 w7: v1(836.77,1184.39) 1147.76,1184.39 1369.72,1406.35 1369.72,1807.28 1550.65,1988.22 v1(1800.46,1988.22)
ULPI-D4: IC15.48 IC29.11 | length 1785.9
  L1 w7: IC29.11@755.81,1177.54 755.81,1154.13 764.09,1145.85 v1(764.09,1145.08) ; v1(1779.53,1961.33) 1777.79,1963.06 1777.79,2118.62 IC15.48@1779.9,2120.73
  L6 w7: v1(764.09,1145.08) 766.99,1145.08 777.41,1155.5 786,1155.5 792.24,1161.73 1170.78,1161.73 1408.89,1399.84 1408.89,1801.79 1568.42,1961.33 v1(1779.53,1961.33)
ULPI-D5: IC15.51 IC29.10 | length 1752
  L1 w7: IC29.10@736.13,1177.54 737.79,1175.88 737.79,1142.82 v1(739.46,1141.15) ; v1(1388.8,2054.59) 1389.94,2053.45 1646.57,2053.45 1647.72,2052.31 IC15.51@1672.11,2052.31
  L4 w7: v1(1112.03,1309.35) 1113.38,1308 v1(1113.38,1121.75)
  L6 w7: v1(739.46,1141.15) 740.73,1141.15 760.14,1121.75 v1(1113.38,1121.75) ; v1(1112.03,1309.35) 1112.03,1777.82 v1(1388.8,2054.59)
ULPI-D6: IC15.52 IC29.9 | length 1813.8
  L1 w7: v1(713.25,1141.09) 714.85,1142.68 714.85,1175.95 IC29.9@716.44,1177.54 ; v1(1420.3,2030.97) 1421.12,2031.8 1671.28,2031.8 IC15.52@1672.11,2032.62
  L4 w7: v1(1141.36,1097.68) 1141.72,1098.03 1141.72,1349.58 v1(1142.07,1349.93)
  L6 w7: v1(713.25,1141.09) 713.25,1113.56 730.31,1096.5 1140.19,1096.5 v1(1141.36,1097.68) ; v1(1142.07,1349.93) 1142.07,1772.42 1398.56,2028.92 1418.25,2028.92 v1(1420.3,2030.97)
ULPI-D7: IC15.91 IC29.8 | length 1837.1
  L1 w7: v1(670.04,1140.47) 672.09,1142.52 687.42,1142.52 696.76,1151.85 IC29.8@696.76,1177.54 ; v1(2014.24,1465.22) 2016.29,1467.27 2019.72,1467.27 2033.4,1480.96 2033.4,1509.04 IC15.91@2035.81,1511.44
  L6 w7: v1(670.04,1140.47) 672.09,1138.42 672.09,1104.42 702.04,1074.47 1906.04,1074.47 2019.04,1187.47 2019.04,1339.5 2014.24,1344.3 v1(2014.24,1465.22)
ULPI_CLK: IC15.30 R58.1 | length 2450.5
  L1 w10: R58.1@777.04,1052.91 779,1052.91 867.29,1141.21 983.62,1141.21 1026.6,1184.19 1026.6,2093.96 1096.38,2163.75 1367.17,2163.75 1409.39,2121.53 v1(1409.39,2120.38) ; v1(2133,2167.64) 2133.62,2167.03 2133.62,2121.35 IC15.30@2134.24,2120.73
  L6 w10: v1(1409.39,2120.38) 2112.76,2120.38 2133,2140.62 v1(2133,2167.64)
ULPI_DIR: IC15.17 IC29.19 | length 2169.2
  L1 w8: v1(2081.92,1894.06) 2082.24,1893.74 2247.64,1893.74 2247.82,1893.92 2280.5,1893.92 IC15.17@2281.4,1894.83
  L1 w10: IC29.19@775.5,1331.09 775.5,1341.09 776.4,1341.99 791.81,1341.99 800.41,1350.6 v1(802.5,1350.6)
  L3 w8: v1(802.5,1350.6) 803.16,1350.6 812.22,1359.65 1095.56,1359.65 1270.69,1184.51 1379.57,1184.51 v1(1380.73,1185.68)
  L6 w8: v1(1380.73,1185.68) 1382.21,1187.15 1382.21,1194.15 1435.56,1247.5 1821.87,1247.5 1912.42,1338.06 1912.42,1806.56 1999.93,1894.06 v1(2081.92,1894.06)
ULPI_NXT: IC15.18 IC29.18 | length 2160.4
  L1 w8: v1(2193.98,1915.01) 2194.23,1914.76 2281.15,1914.76 IC15.18@2281.4,1914.51
  L1 w10: IC29.18@803.05,1303.53 803.05,1321.44 814.71,1333.09 827.82,1333.09 v1(829.3,1334.57)
  L3 w8: v1(829.3,1334.57) 830.6,1333.27 1043.19,1333.27 1220.87,1155.6 1303.01,1155.6 v1(1303.05,1155.64)
  L6 w8: v1(1303.05,1155.64) 1421.9,1274.49 1805.55,1274.49 1857.31,1326.24 1857.31,1786.87 1985.44,1915.01 v1(2193.98,1915.01)
ULPI_STP: IC15.15 IC29.20 | length 2175.7
  L1 w8: v1(2184.08,1852.35) 2186.17,1852.35 2189.28,1855.46 IC15.15@2281.4,1855.46
  L1 w10: IC29.20@755.81,1331.09 756.72,1331.99 756.72,1352.14 767.74,1363.16 v1(767.74,1365.25)
  L3 w8: v1(767.74,1365.25) 787.79,1385.3 1136.04,1385.3 1304.18,1217.16 1449.01,1217.16 v1(1451.79,1219.95)
  L6 w8: v1(1451.79,1219.95) 1840.41,1219.95 1936.05,1315.58 1936.05,1794.58 1993.81,1852.35 v1(2184.08,1852.35)
USB_N: IC29.5 J6.A7 J6.B7 | length 433.6
  L1 w10.92: J6.A7@314.47,1183.84 287.6,1183.84 cw(c287.6,1202.49) 268.95,1202.49 cw(c289.68,1202.49) 289.68,1223.21 J6.B7@314.47,1223.21 ; J6.B7@329.95,1224.41 649.13,1224.41 IC29.5@649.51,1224.79 IC29.5@649.21,1224.49
USB_P: IC29.6 J6.A6 J6.B6 | length 394.8
  L1 w10.92: J6.B6@314.47,1164.16 324.62,1164.16 ccw(c324.62,1205.49) 365.95,1205.49 ; J6.A6@329.95,1205.49 365.95,1205.49 ; IC29.6@649.51,1205.1 649.13,1205.49 365.95,1205.49
USB_RESET: IC15.44 IC29.22 | length 1963
  L1 w10: IC29.22@716.44,1331.09 717.2,1331.84 717.2,1362.72 v1(717.95,1363.48) ; v1(1061.86,1428.95) 1061.86,2085.92 1109.27,2133.33 1325.93,2133.33 v1(1326.43,2133.83) ; v1(1854.56,2165.51) 1854.56,2163.43 1857.74,2160.24 1857.74,2121.64 IC15.44@1858.64,2120.73
  L3 w10: v1(717.95,1363.48) 716.48,1364.95 716.48,1370.41 715.01,1371.88 715.01,1407.38 736.23,1428.61 1061.52,1428.61 v1(1061.86,1428.95)
  L6 w10: v1(1326.43,2133.83) 1327.91,2135.31 1347.71,2135.31 1357.54,2145.14 1834.12,2145.14 v1(1854.56,2165.51) v1(1854.56,2165.51)
pads on no net: IC1.6 IC1.7 IC1.8 IC3.1 IC3.2 IC3.3 IC3.4 IC3.5 IC3.6 IC3.7 IC3.8 IC3.9 IC3.10 IC3.11 IC3.12 IC3.13 IC3.14 IC3.17 IC3.18 IC3.19 IC3.21 IC3.23 IC3.24 IC7.11 IC7.22 IC8.6 IC9.6 IC15.2 IC15.3 IC15.7 IC15.8 IC15.9 IC15.13 IC15.16 IC15.23 IC15.34 IC15.39 IC15.40 IC15.41 IC15.45 IC15.46 IC15.53 IC15.54 IC15.55 IC15.56 IC15.57 IC15.61 IC15.62 IC15.68 IC15.69 IC15.70 IC15.71 IC15.77 IC15.81 IC15.82 IC15.84 IC15.85 IC15.86 IC15.88 IC15.90 IC16.5 IC16.7 IC17.5 IC17.7 IC18.1 IC18.5 IC19.8 IC20.5 IC21.5 IC23.4 IC24.8 IC27.4 IC28.3 IC29.1 IC29.7 J6.A8 J6.B8 J6.MH1 J6.MH2 S1.A2 S1.C2 S2.A2 S2.C2 S3.A2 S3.C2 Y1.1 Y2.1

## Polygon pours and split planes (outlines as drawn)
GND on L1 "GND_L-01_P-005" (solid, pour order 38): 4743.13,2164.83 3504.55,2164.83 ccw(c3504.55,2064.83) 3404.55,2064.83 3404.55,1024.67 ccw(c3504.55,1024.67) 3504.55,924.67 4743.13,924.67
GND on L1 "GND_L-01_P-004" (solid, pour order 44): 4743.13,3333.47 3566.04,3333.47 ccw(c3566.04,3233.47) 3466.04,3233.47 3466.04,2162.36 3466.04,2157.33 3536.04,2159.18 4119.19,2162.36 4743.13,2155.75
+5VA on L1 "+5VA_L-01_P-001" (solid, pour order 36): 2125.02,861.68 2125.02,995.54 cw(c2152.58,995.54) 2152.58,1023.09 2349.43,1023.09 cw(c2349.43,999.47) 2373.05,999.47 2373.05,861.68
+5VD on L1 "+5VD_L-01_P-001" (solid, pour order 33): 3404.55,790.81 3404.55,877.43 3502.98,877.43 3502.98,790.81
+5VA on L1 "+5VA_L-01_P-001" (solid, pour order 29): 2577.78,822.31 2424.24,822.31 2424.24,775.06 2577.78,775.06
+3V3A on L1 "+3V3A_L-01_P-001" (solid, pour order 27): 4172.27,802.62 4231.32,802.62 4231.32,767.19 4337.62,767.19 4337.62,853.8 4172.27,853.8
-5VA on L1 "-5VA_L-01_P-001" (solid, pour order 24): 2290.38,389.24 2207.7,389.24 2215.57,397.11 2215.57,558.53 2290.38,558.53
+5VD on L1 "+5VD_L-01_P-001" (solid, pour order 14): 3249.04,842.34 3249.04,791.65 3282.38,792.03 3315.82,791.91 3383.88,791.65 3383.88,842.34
+5V8 on L1 "+5V8_L-01_P-001" (solid, pour order 15): 3168.5,822.43 3168.5,791.43 3085.5,791.43 3085.5,822.43
MCU_VDDA on L1 "MCU_VDDA_L-01_P-001" (solid, pour order 19): 2366.04,1998.47 2252.04,1998.47 2252.04,1966.47 2366.04,1966.47
+5V8 on L1 "+5V8_L-01_P-001" (solid, pour order 16): 2657.04,821.47 2691.04,821.47 2691.04,836.47 2806.12,836.47 2806.12,791.47 2657.04,791.47
+5V8 on L1 "+5V8_L-01_P-001" (solid, pour order 13): 2102.74,661.52 2101.4,660.18 2101.4,523.1 2014.79,523.1 2009.18,523.1 2009.18,660.88
+12V on L1 "+12V_L-01_P-001" (solid, pour order 12): 3215.07,425.83 3215.34,426.11 3215.34,540.89 3179.41,540.89 3179.41,425.83
-5V8 on L1 "-5V8_L-01_P-001" (solid, pour order 11): 2302.19,341.99 2302.19,271.13 ccw(c2325.81,271.13) 2325.81,247.5 2325.81,176.64 2376.99,176.64 2376.99,341.99
NetC148_2 on L1 "NetC148_2_L-01_P-001" (solid, pour order 10): 3258.88,389.24 3373.05,389.24 3373.05,420.73 3258.88,420.73
GND on L1 "GND_L-01_P-001" (solid, pour order 7): 892.74,574.28 892.74,305.58 1008.88,305.58 1007.9,306.56 1007.9,573.47
+5V8 on L1 "+5V8_L-01_P-001" (solid, pour order 5): 1569.27,661.52 2098.8,661.52 2098.8,620.18 1569.27,620.18
+12V on L1 "+12V_L-01_P-001" (solid, pour order 2): 1344.51,449.28 1314,449.28 1314,557.54 1344.51,557.54
NetC128_2 on L1 "NetC128_2_L-01_P-001" (solid, pour order 1): 1388.8,444.35 1476.4,444.35 cw(c1476.4,435.5) 1485.26,435.5 1485.26,418.76 cw(c1476.17,423.92) 1478.95,413.84 1388.8,413.84
GND on L6 "NONET_L-01_P-001" (solid, pour order 45): 4240.16,1597.44 4337.6,1597.44 4337.6,1499.02 4239.17,1499.02
+3V3A on L6 "+3V3A_L-06_P-001" (solid, pour order 28): 4172.27,853.8 4337.62,853.8 4337.62,771.13 4333.68,767.19 4231.32,767.19 4231.32,802.62 4172.27,802.62
+5VA on L4 "+5VA_L-04_P-001" (solid, pour order 31): 2125.02,1023.09 2373.05,1023.09 2373.05,857.74 2125.02,857.74
-5VA on L4 "-5VA_L-04_P-001" (solid, pour order 25): 2290.38,558.53 2215.57,558.53 2215.57,385.3 2290.38,385.3
+5VA on L3 "+5VA_L-03_P-001" (solid, pour order 30): 2125.02,1023.09 2373.05,1023.09 2373.05,857.74 2125.02,857.74
no net on Bottom Solder "NONET_L-01_P-001" (solid): 4239.17,1597.44 4337.6,1597.44 4337.6,1500 4239.17,1500
GND on L5(GND) (split plane): 4577.53,3443.66 4589.05,3442.52 4600.47,3440.64 4611.74,3438.01 4622.81,3434.65 4633.64,3430.57 4644.18,3425.8 4654.39,3420.34 4664.22,3414.23 4673.62,3407.49 4682.57,3400.15 4691.02,3392.24 4698.93,3383.79 4706.27,3374.85 4713.01,3365.44 4719.12,3355.61 4724.57,3345.41 4729.35,3334.87 4733.43,3324.03 4736.79,3312.96 4739.41,3301.69 4741.3,3290.27 4742.43,3278.76 4742.79,3267.89 4742.72,3267.19 4742.72,196.32 4742.79,195.63 4742.43,184.76 4741.3,173.24 4739.41,161.82 4736.79,150.55 4733.43,139.48 4729.35,128.65 4724.57,118.11 4719.12,107.9 4713.01,98.07 4706.27,88.67 4698.93,79.72 4691.02,71.27 4682.57,63.36 4673.62,56.02 4664.22,49.28 4654.39,43.17 4644.18,37.72 4633.64,32.94 4622.81,28.86 4611.74,25.5 4600.47,22.88 4589.05,20.99 4577.53,19.86 4566.66,19.5 4565.97,19.57 195.89,19.57 195.19,19.5 184.32,19.86 172.81,20.99 161.39,22.88 150.12,25.5 139.04,28.86 128.21,32.94 117.67,37.72 107.47,43.17 97.64,49.28 88.23,56.02 79.29,63.36 70.84,71.27 62.93,79.72 55.59,88.67 48.85,98.07 42.74,107.9 37.28,118.11 32.51,128.65 28.43,139.48 25.07,150.55 22.44,161.82 20.56,173.24 19.42,184.76 19.07,195.63 19.14,196.32 19.14,3267.19 19.07,3267.89 19.42,3278.76 20.56,3290.27 22.44,3301.69 25.07,3312.96 28.43,3324.03 32.51,3334.87 37.28,3345.41 42.74,3355.61 48.85,3365.44 55.59,3374.85 62.93,3383.79 70.84,3392.24 79.29,3400.15 88.23,3407.49 97.64,3414.23 107.47,3420.34 117.67,3425.8 128.21,3430.57 139.04,3434.65 150.12,3438.01 161.39,3440.64 172.81,3442.52 184.32,3443.66 195.19,3444.01 195.89,3443.94 4565.97,3443.94 4566.66,3444.01
GND on L2(GND) (split plane): 4577.53,3443.66 4589.05,3442.52 4600.47,3440.64 4611.74,3438.01 4622.81,3434.65 4633.64,3430.57 4644.18,3425.8 4654.39,3420.34 4664.22,3414.23 4673.62,3407.49 4682.57,3400.15 4691.02,3392.24 4698.93,3383.79 4706.27,3374.85 4713.01,3365.44 4719.12,3355.61 4724.57,3345.41 4729.35,3334.87 4733.43,3324.03 4736.79,3312.96 4739.41,3301.69 4741.3,3290.27 4742.43,3278.76 4742.79,3267.89 4742.72,3267.19 4742.72,196.32 4742.79,195.63 4742.43,184.76 4741.3,173.24 4739.41,161.82 4736.79,150.55 4733.43,139.48 4729.35,128.65 4724.57,118.11 4719.12,107.9 4713.01,98.07 4706.27,88.67 4698.93,79.72 4691.02,71.27 4682.57,63.36 4673.62,56.02 4664.22,49.28 4654.39,43.17 4644.18,37.72 4633.64,32.94 4622.81,28.86 4611.74,25.5 4600.47,22.88 4589.05,20.99 4577.53,19.86 4566.66,19.5 4565.97,19.57 195.89,19.57 195.19,19.5 184.32,19.86 172.81,20.99 161.39,22.88 150.12,25.5 139.04,28.86 128.21,32.94 117.67,37.72 107.47,43.17 97.64,49.28 88.23,56.02 79.29,63.36 70.84,71.27 62.93,79.72 55.59,88.67 48.85,98.07 42.74,107.9 37.28,118.11 32.51,128.65 28.43,139.48 25.07,150.55 22.44,161.82 20.56,173.24 19.42,184.76 19.07,195.63 19.14,196.32 19.14,3267.19 19.07,3267.89 19.42,3278.76 20.56,3290.27 22.44,3301.69 25.07,3312.96 28.43,3324.03 32.51,3334.87 37.28,3345.41 42.74,3355.61 48.85,3365.44 55.59,3374.85 62.93,3383.79 70.84,3392.24 79.29,3400.15 88.23,3407.49 97.64,3414.23 107.47,3420.34 117.67,3425.8 128.21,3430.57 139.04,3434.65 150.12,3438.01 161.39,3440.64 172.81,3442.52 184.32,3443.66 195.19,3444.01 195.89,3443.94 4565.97,3443.94 4566.66,3444.01

## Other copper
L1:
  pour cut-out: 4664.51,3276.7 3583.08,3276.7 ccw(c3583.08,3226.7) 3533.08,3226.7 3533.08,2167.82 4661.62,2167.82
  pour cut-out: 4666.15,2102.48 3498.77,2102.48 ccw(c3498.77,2072.24) 3477.38,2093.62 ccw(c3496.39,2074.61) 3469.51,2074.61 3469.51,1550.32 ccw(c3471.89,1547.94) 3468.53,1547.94 3468.53,1044.41 ccw(c3525.56,1044.41) 3485.23,1004.09 3486.24,1003.07 ccw(c3514.76,1031.59) 3514.76,991.26 4667.13,991.26
  pour cut-out: 4742.52,3233.47 4666.04,3233.47 4666.04,2813.47 4742.52,2813.47
  pour cut-out: 3466.04,2893.47 3536.04,2893.47 3536.04,2783.47 3466.04,2783.47
  pour cut-out: 4665.38,1764.24 4743.13,1764.24 4743.13,1338.06 4665.38,1338.06
  pour cut-out: 3404.55,1325.26 3468.53,1325.26 3468.53,1270.14 3404.55,1270.14
  pour cut-out: 4383.88,2164.83 4476.4,2164.83 4476.4,2102.82 4383.88,2102.82

## Silkscreen, mask and mechanical layers (free items; w line width, h text height)
Top Overlay:
  drawing of 81 lines, arcs and shapes, not listed
  text "FMCW Radar" at 2259.95,3278.59 h250
  text "6GHz" at 1915.16,3259.85 h105.75
  text "TX STANDBY" at 62.19,2948.88 h70
  text "LOW" at 313.14,2905.34 h55.12
  text "RX" at 4590.76,2716.01 h140
  text "BOOT1" at 67.87,2559.11 h70
  text "LOW" at 317.07,2558.89 h55.12
  text "MISC2" at 2473.42,2385.8 h60
  text "MISC1" at 2676.48,2385.8 h60
  text "GND" at 2584.08,2216.51 h60
  text "GND" at 2808.49,2216.51 h60
  text "BOOT0" at 72.18,2192.97 h70
  text "LOW" at 309.2,2192.74 h55.12
  text "SWO" at 396.18,1826.89 h60 r90
  text "NRST" at 187.52,1821.2 h60 r90
  text "+3V3D" at 293.81,1819.17 h60 r90
  text "SWD" at 100.9,1650.2 h60 r90
  text "DIO" at 396.18,1512.44 h60 r90
  text "CLK" at 179.64,1507.03 h60 r90
  text "GND" at 285.94,1497.9 h60 r90
  text "TX" at 4586.04,1265.78 h140
  text "+5VA" at 1958.66,964.48 h71.81
  text "POWER ON" at 1276.13,897.76 h100
  text "+1V8D" at 383.21,891.64 h71.81
  text "+3V3D" at 834.82,808.97 h71.81
  text "+3V3A" at 4389.62,781.41 h71.81
  text "+4V1" at 63.01,755.82 h71.81
  text "+3VA" at 4312.99,403.46 h71.81
  text "VIN: 8V-14V" at 181.13,237.66 h71.81 r90